# EAGLE board Assessment I Sistem Kendali - Muhammad Rifki Ferdiansyah - 6702194022 (EAGLE 7.6.0)

Size 73.58 x 63.39 mm. Coordinates in mm from the lower left corner, seen from the top.
Outline: 0,0 56.82,0 56.82,53.33 0,53.33 0,0
Copper layers (1*16): Top 0.035mm / dielectric 1.5mm / Bottom 0.035mm
Design rules "default": minimum track width 10mil, minimum drill 24mil, track to track 8mil, track to pad 8mil, pad to pad 8mil, via to via 8mil, smd to smd 8mil, copper to edge 40mil, drill to drill 8mil, minimum pad ring 10mil, minimum via ring 8mil, stop-mask expansion 4mil, vias tented up to drill 0mil, thermal gap 10mil

## Footprints (pad centres in the part's own frame; a part is rotated, then mirrored left to right if it is on the bottom)
LED5MM = drill 0.813 octagon: A -1.27,0; K 1.27,0
2P-2.54-65/35MIL = drill 0.889 pad 1.651 square: 1 0,1.27 | drill 0.889 pad 1.651: 2 0,-1.27
0207/10 = drill 0.813 octagon: 1 -5.08,0; 2 5.08,0
DIL16 = drill 0.813 long: 1 -8.89,-3.81; 2 -6.35,-3.81; 3 -3.81,-3.81; 4 -1.27,-3.81; 5 1.27,-3.81; 6 3.81,-3.81; 7 6.35,-3.81; 8 8.89,-3.81; 9 8.89,3.81; 10 6.35,3.81; 11 3.81,3.81; 12 1.27,3.81; 13 -1.27,3.81; 14 -3.81,3.81; 15 -6.35,3.81; 16 -8.89,3.81
ARDUINO_UNO = drill 1.016 pad 1.88: 0 63.5,50.8; 1 60.96,50.8; 2 58.42,50.8; 3 55.88,50.8; 3.3V 35.56,2.54; 4 53.34,50.8; 5 50.8,50.8; 5V 38.1,2.54; 6 48.26,50.8; 7 45.72,50.8; 8 41.656,50.8; 9 39.116,50.8; 10 36.576,50.8; 11 34.036,50.8; 12 31.496,50.8; 13 28.956,50.8; A0 50.8,2.54; A1 53.34,2.54; A2 55.88,2.54; A3 58.42,2.54; A4 60.96,2.54; A5 63.5,2.54; AREF 23.876,50.8; GND 26.416,50.8; GND. 43.18,2.54; GND.. 40.64,2.54; I/OREF 30.48,2.54; N/C 27.94,2.54; RESET 33.02,2.54; SCL 18.796,50.8; SDA 21.336,50.8; VIN 45.72,2.54 | hole 3.2: 66.04,7.62; 66.04,35.56; 15.24,50.8; 13.97,2.54

## Placement (x,y rotation side)
D1  [LED5MM]  not placed on the board
D2  [LED5MM]  not placed on the board
M1  [2P-2.54-65/35MIL]  5,22.78 0 top
M2  [2P-2.54-65/35MIL]  5,35.48 0 top
R5  33k‎Ω  [0207/10]  not placed on the board
R6  33k‎Ω  [0207/10]  not placed on the board
R7  33k‎Ω  [0207/10]  not placed on the board
R8  33k‎Ω  [0207/10]  not placed on the board
R9  33k‎Ω  [0207/10]  not placed on the board
R11  33k‎Ω  [0207/10]  not placed on the board
R12  1k‎Ω  [0207/10]  not placed on the board
R13  1k‎Ω  [0207/10]  not placed on the board
U1  [LED5MM]  5,48.18 0 top
U2  [LED5MM]  5,60.88 0 top
U3  [LED5MM]  not placed on the board
U4  [LED5MM]  not placed on the board
U5  [LED5MM]  not placed on the board
U6  [LED5MM]  not placed on the board
U7  [DIL16]  not placed on the board
Uarduino   [ARDUINO_UNO]  5,10.08 0 top

## Library data of the parts
D1 D2 M1 M2 R5-R9 R11-R13 U1-U7 Uarduino  = AUTODESK_CIRCUITS_BREADBOARD

## Nets
N$1: R5.2 U1.A Uarduino .A0
N$2: R6.2 U2.A Uarduino .A1
N$3: R7.2 U3.A Uarduino .A2
N$4: R8.2 U4.A Uarduino .A3
N$5: R9.2 U5.A Uarduino .A4
N$6: R11.2 U6.A Uarduino .A5
N$7: D1.A R12.1
N$8: U7.2 Uarduino .5
N$9: M2.2 U7.3
N$10: M2.1 U7.6
N$11: M1.1 U7.14
N$12: U7.9 Uarduino .2
N$13: R12.2 Uarduino .7
N$14: R13.2 Uarduino .8
N$15: U7.10 Uarduino .3
N$16: U7.1 Uarduino .4
N$17: D2.A R13.1
N$18: U7.7 Uarduino .6
N$19: D1.K D2.K R5.1 R6.1 R7.1 R8.1 R9.1 R11.1 U7.4 U7.5 U7.12 U7.13 Uarduino .GND.
N$20: M1.2 U7.11
N$21: U7.15 Uarduino .11
N$22: U1.K U2.K U3.K U4.K U5.K U6.K U7.8 U7.16 Uarduino .5V

## Tracks (layer width: path | path; a pad name or v marks a point on that pad's centre or on a via)
N$1  (2 unrouted)
N$2  (2 unrouted)
N$3  (2 unrouted)
N$4  (2 unrouted)
N$5  (2 unrouted)
N$6  (2 unrouted)
N$7  (1 unrouted)
N$8  (1 unrouted)
N$9  (1 unrouted)
N$10  (1 unrouted)
N$11  (1 unrouted)
N$12  (1 unrouted)
N$13  (1 unrouted)
N$14  (1 unrouted)
N$15  (1 unrouted)
N$16  (1 unrouted)
N$17  (1 unrouted)
N$18  (1 unrouted)
N$19  (12 unrouted)
N$20  (1 unrouted)
N$21  (1 unrouted)
N$22  (8 unrouted)